# Altium PCB percepcao_externa_official.PcbDoc
Units mm, origin at the board's own origin, x right, y up, seen from the top; angles counter-clockwise.
Board outline 65.02 x 99.95 mm, 2 copper layers (Top Layer, Bottom Layer); 30 components, 27 nets, 149 pads, 15 vias.
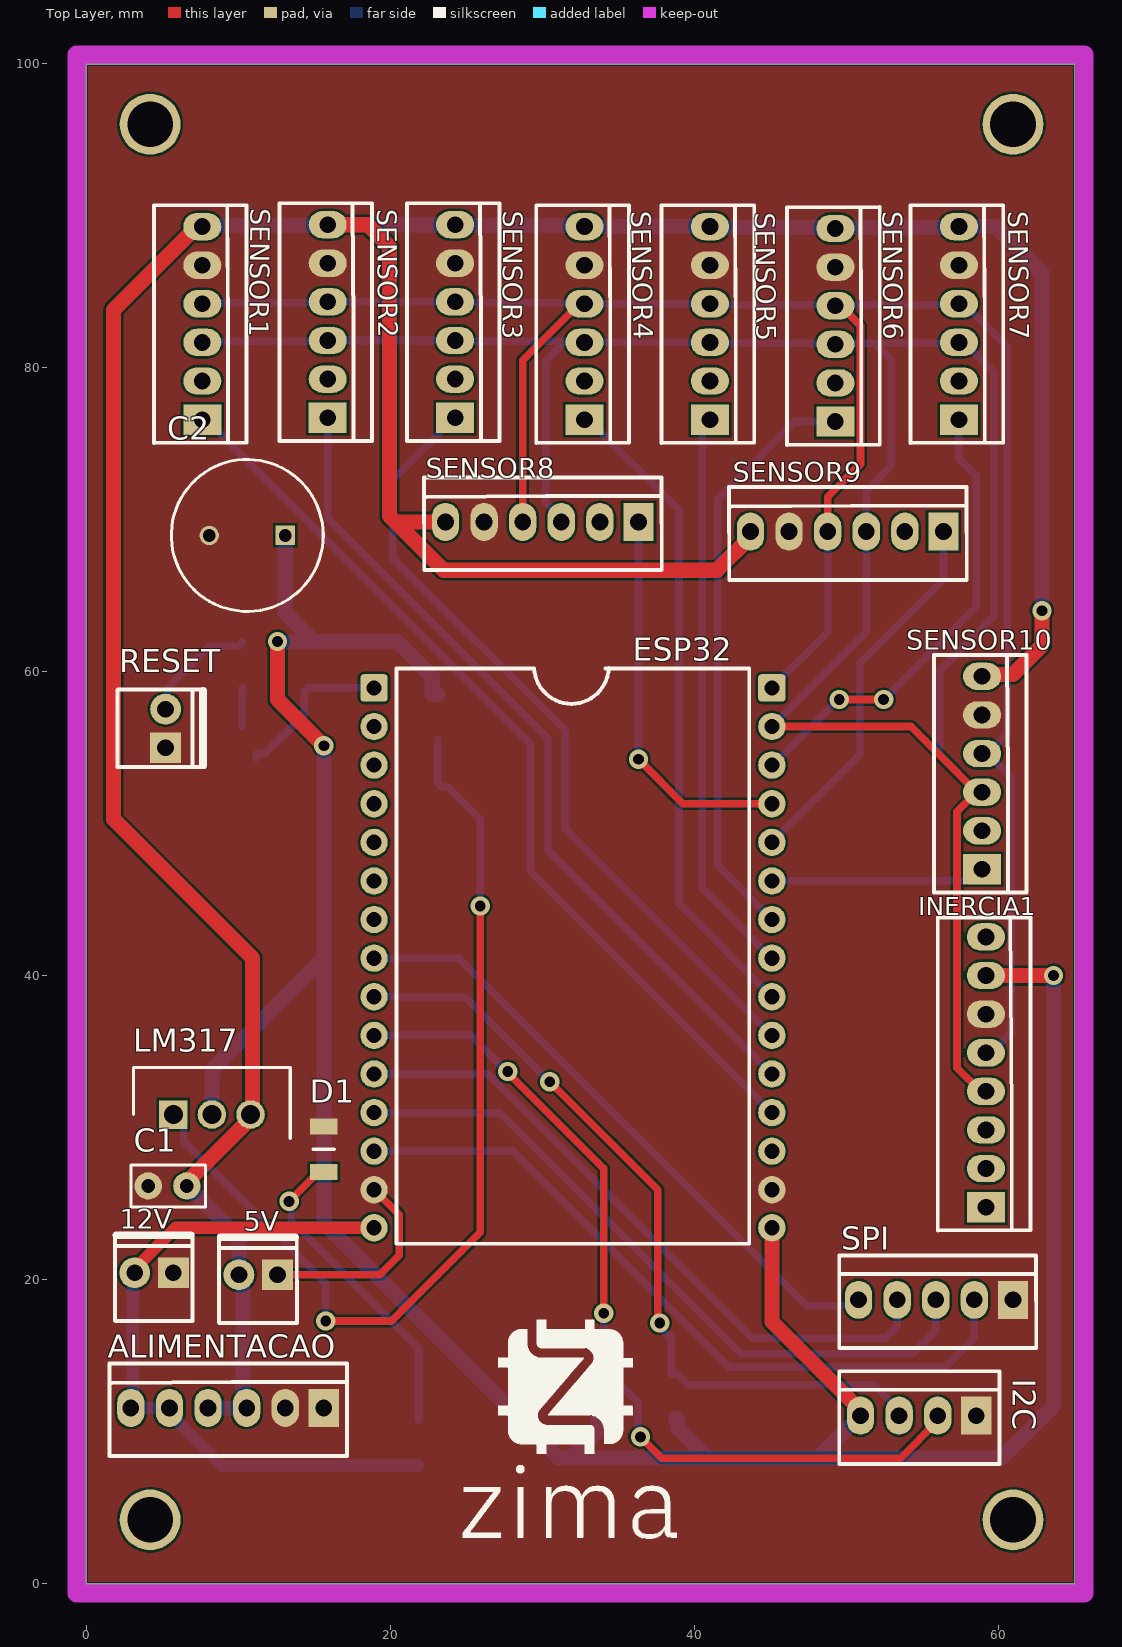
[diagram p0: Top Layer view]
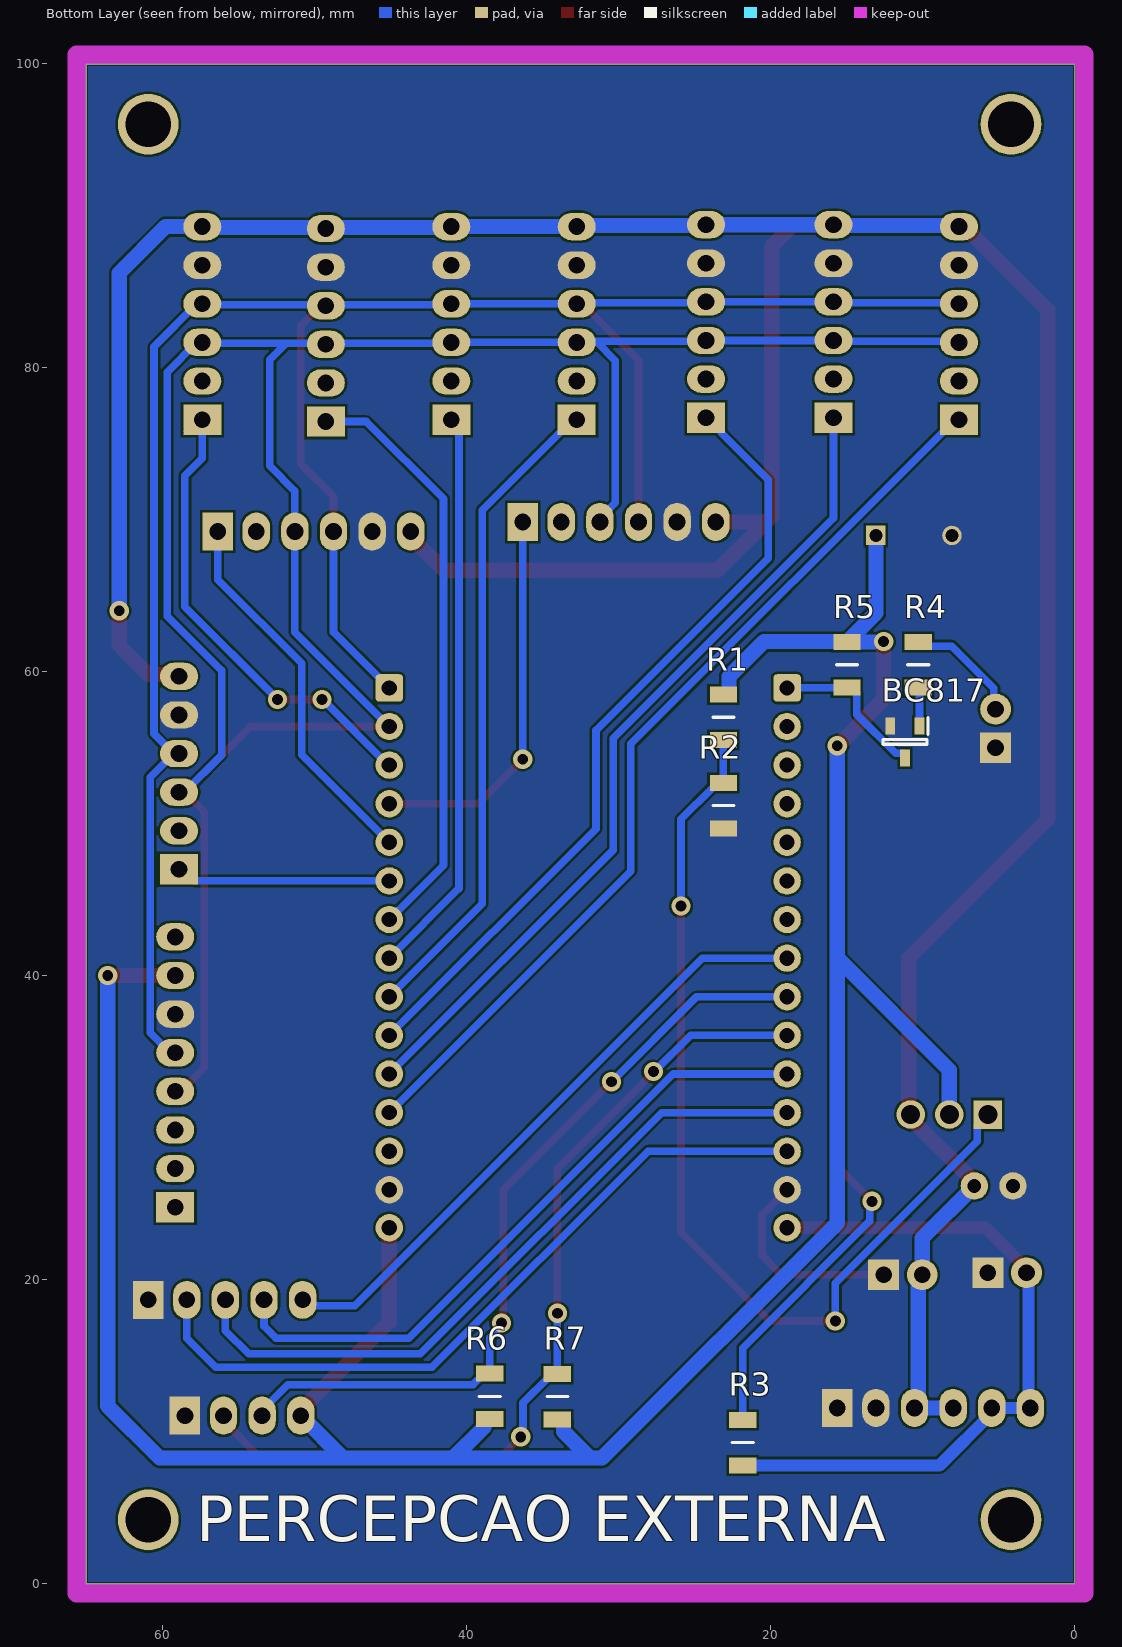
[diagram p1: Bottom Layer view, seen from below]

## Layer stack, top to bottom
Top Solder: solder mask 0.0102, Solder Resist, Dk 3.5
Top Layer: signal copper 0.0356
Dielectric 1: dielectric 0.32, FR-4, Dk 4.8
Bottom Layer: signal copper 0.0356
Bottom Solder: solder mask 0.0102, Solder Resist, Dk 3.5

## Board outline
0,0 65.024,0 65.024,99.949 0,99.949

## Design rules (kind name [scope] priority, off if disabled: settings)
Clearance [All] p1: gap=0.152 ignorepadtopadclearanceinfootprint=FALSE except(0: Arc-Hole Track-Hole SMDPad-Hole THPad-Hole Via-Hole Fill-Hole Poly-Hole Region-Hole Text-Hole)
ComponentClearance [All] p1: gap=0.1 collisioncheckmode=3 verticalgap=0.1 showdistances=FALSE
HoleSize [All] p1: absolutevalues=TRUE maxlimit=3 minlimit=0.025 maxpercent=80.000 minpercent=20.000
MinimumSolderMaskSliver [All] p1: minsoldermaskwidth=0.1
PolygonConnect [All] p1: connectstyle=Direct reliefconductorwidth=0.254 reliefentries=4 polygonreliefangle="90 Angle" airgapwidth=0.254
RoutingVias [All] p1: holewidth=0.4 width=0.8 viastyle="Through Hole" minholewidth=0.3 minwidth=0.6 maxholewidth=0.5 maxwidth=1
SilkToSilkClearance [All] p1: silktosilkclearance=0
SilkToSolderMaskClearance [IsPad] p1: minsilkscreentomaskgap=0 clearancetoexposedcopper=TRUE
SolderMaskExpansion [All] p1: expansion=0.08 istentingtop=FALSE
Width [All] p1: maxlimit=1 minlimit=0.3 preferedwidth=0.5
25 further rules are at their usual default settings.

## Classes and differential pairs
component class U_percepcao_externa_sensores: INERCIA1 SENSOR1 SENSOR2 SENSOR3 SENSOR4 SENSOR5 SENSOR6 SENSOR7 SENSOR8 SENSOR9 SENSOR10
component class U_percepcao_externa_comunicacao: I2C R6 R7 SPI
component class U_percepcao_externa_alimentacao: 5V 12V ALIMENTACAO BC817 D1 R3 R4 R5 RESET
component class percepcao_externa_official: C1 C2 ESP32 LM317 R1 R2

## Components (designator, comment, footprint, x,y, rotation, side; value= is the part's Value field where it differs from the comment)
5V "KK_2.54_2vias" KK_2VIAS_180º 12.573,20.32 r180 top
12V "KK_2.54_2vias" KK_2VIAS_180º 5.715,20.447 r180 top
ALIMENTACAO "KK_2.54_6vias" KK_6vias_180° 15.621,11.557 r180 top
BC817 "Trans BC817" SOT96P240X110-3N 11.176,55.372 r270 bottom
C1 "100nF" "CAP CER DISK 10uF 50V" 5.334,26.162 r0 top
C2 "Cap. Elet. 1uF 50V" "Cap. Elet. 470uF 16V" 13.081,68.961 r180 top
D1 "LED 3MM RED" "LED RED" 15.621,28.575 r90 top
ESP32 "microcontrolador" ESP32_Desvikit_v1 18.923,58.928 r0 top value="ESP32 Desvikit V1"
I2C "KK_2.54_4vias" KK_4vias_180° 58.547,11.049 r180 top
INERCIA1 "KK_2.54_8vias" KK_8vias_180° 59.182,24.765 r90 top
LM317 "LM317" TO254P467X1016X1971-3P 5.715,30.861 r0 top
R1 "240k" RESC3216X60N 23.114,56.999 r90 bottom
R2 "390k" RESC3216X60N 23.114,51.181 r90 bottom
R3 "680R" RESC3216X60N 21.844,9.271 r90 bottom
R4 "2k2" RESC3216X60N 10.287,60.452 r90 bottom
R5 "2k2" RESC3216X60N 14.986,60.452 r90 bottom
R6 "4k7" RESC3216X60N 38.481,12.319 r270 bottom
R7 "4k7" RESC3216X60N 34.036,12.295 r270 bottom
RESET "KK_2.54_2vias" KK_2VIAS_180º 5.207,54.991 r90 top
SENSOR1 "KK_2.54_6vias" KK_6vias_180° 7.62,76.581 r90 top
SENSOR2 "KK_2.54_6vias" KK_6vias_180° 15.875,76.708 r90 top
SENSOR3 "KK_2.54_6vias" KK_6vias_180° 24.257,76.708 r90 top
SENSOR4 "KK_2.54_6vias" KK_6vias_180° 32.766,76.581 r90 top
SENSOR5 "KK_2.54_6vias" KK_6vias_180° 41.021,76.581 r90 top
SENSOR6 "KK_2.54_6vias" KK_6vias_180° 49.276,76.454 r90 top
SENSOR7 "KK_2.54_6vias" KK_6vias_180° 57.404,76.581 r90 top
SENSOR8 "KK_2.54_6vias" KK_6vias_180° 36.322,69.85 r180 top
SENSOR9 "KK_2.54_6vias" KK_6vias_180° 56.388,69.215 r180 top
SENSOR10 "KK_2.54_6vias" KK_6vias_180° 58.928,46.99 r90 top
SPI "KK_2.54_5vias" KK_5vias_180° 60.96,18.669 r180 top

## Footprints (in the part's own frame and the unit in brackets; to place one, negate y for a bottom-side part, rotate by r counter-clockwise, add the part's x,y. Pads: shape width x height; smd on the part's side, far side on the other; paste and mask are expansions set on the pad)
"CAP CER DISK 10uF 50V" [mm] "Connector; Header; 5 Position"
  round 1.8 hole 0.9: 1(-1.27,0) 2(1.27,0)
  silkscreen extent -2.4,-1.4 2.5,1.37, body extent -2.28,-1.25 2.42,1.25, height 6.1
"Cap. Elet. 470uF 16V" [mm]
  rect 1.275x1.275 hole 0.85: 1(0,0)
  round 1.275 hole 0.85: 2(5,0)
  silkscreen extent -2.5,-5 7.5,5, body extent -2.75,-5.25 7.75,5.25, height 13
ESP32_Desvikit_v1 [mm]
  rrect25% 1.8x1.8 hole 1: 1(0,0) 30(26.175,0)
  round 1.8 hole 1: 2(0,-2.54) 3(0,-5.08) 4(0,-7.62) 5(0,-10.16) 6(0,-12.7) 7(0,-15.24) 8(0,-17.78) 9(0,-20.32) 10(0,-22.86) 11(0,-25.4) 12(0,-27.94) 13(0,-30.48) 14(0,-33.02) 15(0,-35.52) 16(26.175,-35.52) 17(26.175,-33.02) 18(26.175,-30.48) 19(26.175,-27.94) 20(26.175,-25.4) 21(26.175,-22.86) 22(26.175,-20.32) 23(26.175,-17.78) 24(26.175,-15.24) 25(26.175,-12.7) 26(26.175,-10.16) 27(26.175,-7.62) 28(26.175,-5.08) 29(26.175,-2.54)
  silkscreen extent 1.47,-36.57 24.69,1.31, body extent -1.2,-46.03 27.4,4.9, height 15.1
KK_2VIAS_180º [mil]
  rect 80x80 hole 43.31: 1(0,0)
  round 80 hole 43.31: 2(100,0)
  silkscreen extent -50,-101 151,125, body extent -61,-108 165,128, height 465
KK_4vias_180° [mm]
  rect 2x2.5 hole 1.1: 1(0,0)
  oval 1.8x2.5 hole 1.1: 2(2.54,0) 3(5.08,0) 4(7.62,0)
  silkscreen extent -1.53,-2.92 9.02,3.18, body extent -1.4,-2.79 8.76,3.01, height 10.12
KK_5vias_180° [mm]
  rect 2x2.5 hole 1.1: 1(0,0)
  oval 1.8x2.5 hole 1.1: 2(2.54,0) 3(5.08,0) 4(7.62,0) 5(10.16,0)
  silkscreen extent -1.53,-2.92 11.43,3.18, body extent -1.4,-2.79 11.3,3.01, height 10.12
KK_6vias_180° [mm]
  rect 2x2.5 hole 1.1: 1(0,0)
  oval 1.8x2.5 hole 1.1: 2(2.54,0) 3(5.08,0) 4(7.62,0) 5(10.16,0) 6(12.7,0)
  silkscreen extent -1.53,-2.92 14.11,3.18, body extent -1.4,-2.79 13.84,3.05, height 10.1
KK_8vias_180° [mm]
  rect 2x2.5 hole 1.1: 1(0,0)
  oval 1.8x2.5 hole 1.1: 2(2.54,0) 3(5.08,0) 4(7.62,0) 5(10.16,0) 6(12.7,0) 7(15.24,0) 8(17.78,0)
  silkscreen extent -1.53,-2.92 19.05,3.18, body extent -1.4,-2.74 18.92,3.1, height 10.1
"LED RED" [mm]
  rect 1.05x1.8 smd: 1(-1.5,0) 2(1.5,0)
  silkscreen extent 0,-0.7 0,0.7, body extent -0.79,-0.43 0.81,0.37, height 0.75
RESC3216X60N [mm]
  rect 1.05x1.8 smd: 1(-1.5,0) 2(1.5,0)
  silkscreen extent 0,-0.7 0,0.7, body extent -1.58,-0.8 1.58,0.8, height 0.6
SOT96P240X110-3N [mm]
  rect 1.1x0.65 smd: 1(-1.05,0.96) 2(-1.05,-0.96) 3(1.05,0)
  silkscreen extent -1.6,-1.45 0.15,1.54, body extent -1.2,-1.45 1.2,1.45, height 1.1
TO254P467X1016X1971-3P [mm]
  rect 1.875x1.875 hole 1.25: 1(0,0)
  round 1.875 hole 1.25: 2(2.54,0) 3(5.08,0)
  silkscreen extent -2.62,-1.59 7.7,3.09, body extent -2.54,-1.59 7.62,3.09, height 18.76

## Part data
5V 12V RESET: "Conector KK 2.54mm 2 vias", Descrição="Conector KK 3 vias com passo 2.54mm", Encapsulamento="PTH - 180º", Modelo="2 vias - 180º", Valor="KK 2 vias 180º"
ALIMENTACAO SENSOR1 SENSOR2 SENSOR3 SENSOR4 SENSOR5 SENSOR6 SENSOR7 SENSOR8 SENSOR9 SENSOR10: "Conector KK 2.54mm 6 vias", Descrição="Conector KK 3 vias com passo 2.54mm", Encapsulamento="PTH - 180º", Modelo="3 vias - 180º", Valor="KK 6 vias 180º"
BC817: "Transistor BJT NPN BC817-25-7-F", Arrow Part Number=BC817-25-7-F, Manufacturer_Name="Diodes Inc.", Mouser Part Number=621-BC817-25-7-F, Arrow Price/Stock=https://www.arrow.com/en/products/bc817-25-7-f/diodes-incorporated, Datasheet Link=https://www.diodes.com/assets/Datasheets/ds11107.pdf, Height=1.1mm, Manufacturer_Part_Number=BC817-25-7-F, Mouser Price/Stock=https://www.mouser.co.uk/ProductDetail/Diodes-Incorporated/BC817-25-7-F?qs=rGAXPo9uwV0jK0EyLZnqOw%3D%3D
C1: library part "CAP CER DISK 10uF 50V_1", "CAP CER DISK 10uF 50V", Capacitance=0.1uF, Capacitance Tolerance="+80%, -20%", Capacitor Terminals="Radial Leaded", Dielectric Characteristic=Y5, Manufacturer=-, Manufacturer Part Number=IMP14925, Operating Temperature Max=85, Operating Temperature Min=-25, Operating Temperature Range="-25°C to +85°C<!--FANDB--><div class=\"features-and-benefits-container\"><div class=\"features-and-benefits-description\"><span class=\"features-benefits-value\">The MCFY series from Multicomp are radial leaded ceramic disc capacitors. The capacitance values ranges from 6800pF to 0.22?F.</span></div><div class=\"features-and-benefits-list\"><ul class=\"features-and-benefits-list-list\"><li class=\"features-and-benefits-list-item\">Large capacitance in small size</li><li class=\"features-and-benefits-list-item\">Rated voltage of 50V</li><li class=\"features-and-benefits-list-item\">80%/-20% tolerance</li><li class=\"features-and-benefits-list-item\">Operating temperature range -25°C to +85", Supplier Part Number 1="Capacitor Cerâmico Disco 100Kpf/50V (104/100K/100nF/0.1uF) cód. 1351", Voltage Rating=50, Capacitance Tolerance ±="+80%, -20%", ComponentLink1Description=http://loja.multcomercial.com.br/capacitor-ceramico-disco-100kpf-50v-104-100k-100nf-0-1uf-cod-1351.html, ComponentLink1URL=http://loja.multcomercial.com.br/capacitor-ceramico-disco-100kpf-50v-104-100k-100nf-0-1uf-cod-1351.html, Lead Spacing=5, Packaging=Each, Pricing 1="1=0.10 (BRL)", Product Range="MCFY Series", RoHS=YES, Stock 1=115809, Supplier 1="Mult Comercial", SVHC="No SVHC (15-Jun-2015)"
C2: library part "Cap. Elet. 470 uF 16V", "Aluminum Organic Polymer Capacitors 16volts 470uF ESR 10mohm", Arrow Part Number=16SEPC470M, Manufacturer_Name=Panasonic, Mouser Part Number=667-16SEPC470M, Arrow Price/Stock=https://www.arrow.com/en/products/16sepc470m/panasonic, Datasheet Link=http://industrial.panasonic.com/www-cgi/jvcr13pz.cgi?E+CI+4+AAB8010+16SEPC470M+8+WW, Height=13mm, Manufacturer_Part_Number=16SEPC470M, Mouser Price/Stock=https://www.mouser.co.uk/ProductDetail/Panasonic/16SEPC470M?qs=OE1iw1LrrPEdZuWyF2l%252B5w%3D%3D
D1: Current If Luminous Intensity=2, Forward Current If=20, Forward Voltage VF Max=2.5, LED Colour=Red, Manufacturer=Paralight, Manufacturer Part Number=IMP585, Operating Temperature Max=85, Operating Temperature Min=-40, Operating Temperature Range="-40°C to +85", Peak Forward Current=7, Supplier Part Number 1="Led 3mm Vermelho Difuso L-314HD - Paralight", Voltage Vf Typ="2.2V<!--FANDB--><div class=\"features-and-benefits-container\"><div class=\"features-and-benefits-description\"><span class=\"features-benefits-value\">The L-934LID from Kingbright is a through hole round shape high efficiency red colour LED. The device is made of gallium arsenide phosphide on gallium phosphide orange light emitting diode. This LED is widely used because of low power consumption, long life and solid state reliability.</span></div><div class=\"features-and-benefits-list\"><ul class=\"features-and-benefits-list-list\"><li class=\"features-and-benefits-list-item\">Standard bulb size of T-1 (3mm)</li><li class=\"features-and-benefits-list-item\">Reliable and rugged</li><li class=\"features-and-benefits-list-item\">Viewing angle is 60°</li><li class=\"features-and-benefits-list-item\">Luminous intensity of 3mcd at 2mA</li><li class=\"features-and-benefits-list-item\">Forward voltage is 2.0V</li><li class=\"features-and-benefits-list-item\">Forward current (If) is 20mA</li><li class=\"features-and-benefits-list-item\">Dominant wavelength is 625nm at IF=20mA</li><li class=\"features-and-benefits-list-item\">Peak wavelength is 627nm at IF=20", Bulb Size=3mm, ComponentLink1Description=http://loja.multcomercial.com.br/led-3mm-vermelho-difuso-l-314hd-paralight.html, ComponentLink1URL=http://loja.multcomercial.com.br/led-3mm-vermelho-difuso-l-314hd-paralight.html, Dominant Wavelength=625, External Diameter=2.9, External Length / Height=4.6, Forward Current If Max=20, Forward Voltage=2, Lead Cross-section Depth=0.5, Lead Cross-section Width=0.5, Lead Spacing=2.54, LED / Lamp Size="3mm / T-1", LED Mounting="Through Hole", LED Type=Standard, Lens Shape=Round, Luminous Intensity=3, Luminous Intensity @ If Min=0.7, Luminous Intensity Typ=3, Mounting Type="PCB Through Hole", MSL=-, No. of Pins=2, Packaging=Each, Peak Wavelength=625, PIV Max=5, Pricing 1="1=0.15 (BRL)", RoHS=YES, Stock 1=35260, Supplier 1="Mult Comercial", SVHC="No SVHC (15-Jun-2015)", Viewing Angle=60°, Wavelength Typ=625
ESP32: library part "ESP32 Desvikit v1", "microcontrolador com moculo bluethoth e wifi"
I2C: "Conector KK 2.54mm 4 vias", Descrição="Conector KK 3 vias com passo 2.54mm", Encapsulamento="PTH - 180º", Modelo="3 vias - 180º", Valor="KK 4 vias 180º"
INERCIA1: "Conector KK 2.54mm 8 vias", Descrição="Conector KK 3 vias com passo 2.54mm", Encapsulamento="PTH - 180º", Modelo="3 vias - 180º", Valor="KK 8 vias 180º"
LM317: "Integrated Circuit", Manufacturer_Name="Changjiang Electronics Tech (CJ)", Datasheet Link=https://datasheet.lcsc.com/szlcsc/Changjiang-Electronics-Tech-CJ-LM317_C22147.pdf, Height=4.67mm, Manufacturer_Part_Number=LM317
R1 R2 R6 R7: library part "RES 1206", "RES 1206 5%", Arrow Part Number=CRCW12064K70FKEA, Manufacturer_Name=Vishay, Mouser Part Number=71-CRCW1206-4.7K-E3, Arrow Price/Stock=https://www.arrow.com/en/products/crcw12064k70fkea/vishay, Datasheet Link=http://docs-emea.rs-online.com/webdocs/13ec/0900766b813ecc08.pdf, Height=0.6mm, Manufacturer_Part_Number=CRCW12064K70FKEA, Mouser Price/Stock=https://www.mouser.co.uk/ProductDetail/Vishay-Dale/CRCW12064K70FKEA?qs=1vm4qhDHCvlKJmatsKzyFQ%3D%3D
R3 R4 R5: library part "Resistor 1206", "Resistor", Arrow Part Number=CRCW12064K70FKEA, Manufacturer_Name=Vishay, Mouser Part Number=71-CRCW1206-4.7K-E3, Arrow Price/Stock=https://www.arrow.com/en/products/crcw12064k70fkea/vishay, Datasheet Link=http://docs-emea.rs-online.com/webdocs/13ec/0900766b813ecc08.pdf, Height=0.6mm, Manufacturer_Part_Number=CRCW12064K70FKEA, Mouser Price/Stock=https://www.mouser.co.uk/ProductDetail/Vishay-Dale/CRCW12064K70FKEA?qs=1vm4qhDHCvlKJmatsKzyFQ%3D%3D
SPI: "Conector KK 2.54mm 5 vias", Descrição="Conector KK 3 vias com passo 2.54mm", Encapsulamento="PTH - 180º", Modelo="3 vias - 180º", Valor="KK 5 vias 180º"

## Free pads (board coordinates)
  round 4 hole 3: 1(4.191,96.012) 2(60.96,96.012) 3(4.191,4.191) 4(60.96,4.191)

## Via types
v1: diameter 1.27, hole 0.711, Top Layer to Bottom Layer, 15 vias

## Nets (pads, with @x,y where several pads share a name; then routed paths per layer and width w, separated by ;. In a path a pad name is that pad's centre, name@x,y a point inside that pad or via, vN(x,y) a via of type N, cw(c..) or ccw(c..) an arc to the next point about the centre after c; other vN are vias at no path point)
3V3: C2.1 ESP32.16 I2C.4 INERCIA1.7 LM317.2 R1.2 R5.2 R6.2 R7.2 | length 187.2
  Top Layer w1: v1(12.573,61.976) 12.573,58.166 v1(15.621,55.118) ; ESP32.16 45.098,17.228 50.927,11.399 I2C.4 ; INERCIA1.7 v1(63.627,40.005)
  Bottom Layer w1: LM317.2 8.255,33.782 15.621,41.148 ; C2.1 13.081,63.857 R5.2 ; v1@13.184,61.952 R5.2 ; v1(15.621,55.118) 15.621,41.148 ; R1.2 22.771,58.499 22.746,58.524 22.746,59.677 20.447,61.976 15.01,61.976 R5.2 ; R7.2 33.661,10.795 33.636,10.77 33.636,10.014 31.877,8.255 ; R6.2@38.754,10.844 38.831,10.844 38.881,10.794 38.881,10.268 40.894,8.255 ; I2C.4 48.133,8.255 ; v1(63.627,40.005) 63.627,11.684 60.198,8.255 48.133,8.255 ; 15.621,41.148 15.621,23.734 31.1,8.255 31.877,8.255 ; 31.877,8.255 40.894,8.255 ; 40.894,8.255 48.133,8.255
+5V: 5V.2 ALIMENTACAO.3 ALIMENTACAO.4 C1.2 LM317.3 SENSOR1.6 SENSOR2.6 SENSOR3.6 SENSOR4.6 SENSOR5.6 SENSOR6.6 SENSOR7.6 SENSOR8.6 SENSOR9.6 SENSOR10.6 | length 228.8
  Top Layer w1: C1.2 6.604,26.416 10.795,30.607 LM317.3 10.922,30.988 10.922,41.148 1.778,50.292 1.778,83.789 7.27,89.281 SENSOR1.6 SENSOR1.6@7.683,89.344 ; SENSOR2.6 18.49,89.408 19.939,87.959 19.939,70.281 ; 19.939,70.231 20.32,69.85 SENSOR8.6 ; 20.355,69.815 23.495,66.675 41.498,66.675 43.688,68.865 SENSOR9.6 ; SENSOR3.6 SENSOR3.6@24.32,89.344 ; SENSOR4.6@32.703,89.344 SENSOR4.6 ; SENSOR5.6 SENSOR5.6@41.084,89.218 ; SENSOR6.6@49.212,89.218 SENSOR6.6 SENSOR6.6@49.34,89.218 ; SENSOR7.6@57.34,89.218 SENSOR7.6 ; SENSOR10.6 59.055,59.817 60.96,59.817 62.865,61.722 v1(62.865,64.008)
  Bottom Layer w1: C1.2 10.033,22.733 5V.2 10.292,20.061 10.292,11.806 ALIMENTACAO.3 ALIMENTACAO.4 ; SENSOR1.6 7.683,89.344 15.811,89.344 SENSOR2.6 SENSOR3.6 24.32,89.344 32.703,89.344 SENSOR4.6 SENSOR5.6 41.084,89.218 49.212,89.218 SENSOR6.6 49.34,89.218 57.34,89.218 SENSOR7.6 59.817,89.281 62.865,86.233 v1(62.865,64.008)
+12V: 12V.2 ALIMENTACAO.5 ALIMENTACAO.6 ESP32.15 R3.1 | length 47.1
  Top Layer w0.8: 12V.2@3.175,20.174 12V.2 3.175,20.72 5.863,23.408 ESP32.15
  Bottom Layer w0.5: ALIMENTACAO.6 ALIMENTACAO.6@3.048,11.684 ; 12V.2@3.048,20.32 12V.2 ; ALIMENTACAO.5@5.461,11.207 ALIMENTACAO.5
  Bottom Layer w0.8: ALIMENTACAO.6 ALIMENTACAO.5 ; ALIMENTACAO.6@3.048,11.684 12V.2@3.048,20.32 ; ALIMENTACAO.5@5.461,11.207 8.897,7.771 R3.1
CLK_IN: ESP32.11 SPI.4 | length 43.7
  Bottom Layer w0.5: ESP32.11 26.416,33.528 43.815,16.129 52.55,16.129 53.34,16.919 SPI.4
EN: BC817.3 ESP32.1 R5.1 | length 10.7
  Bottom Layer w0.5: BC817.3 11.176,54.547 11.251,54.622 11.78,54.622 14.336,57.178 14.336,58.677 14.611,58.952 R5.1 14.998,58.94 18.911,58.94 ESP32.1
GND: 5V.1 12V.1 ALIMENTACAO.1 ALIMENTACAO.2 BC817.2 C1.1 C2.2 D1.2 ESP32.14 ESP32.17 I2C.1 INERCIA1.6 R2.1 RESET.1 SENSOR1.5 SENSOR2.5 SENSOR3.5 SENSOR4.5 SENSOR5.5 SENSOR6.5 SENSOR7.5 SENSOR8.5 SENSOR9.5 SENSOR10.5 SPI.1 | length 13.5
  Top Layer w0.5: 5V.1 19.304,20.32 20.574,21.59 20.574,24.257 ESP32.14
MISO_IN: ESP32.12 SPI.3 | length 46.2
  Bottom Layer w0.5: ESP32.12 27.178,30.988 43.053,15.113 54.356,15.113 55.88,16.637 SPI.3
MOSI_IN: ESP32.13 SPI.2 | length 48.7
  Bottom Layer w0.5: ESP32.13 28.067,28.448 42.291,14.224 56.515,14.224 58.42,16.129 SPI.2
NetBC817_1: BC817.1 R4.1 | length 2.6
  Bottom Layer w0.5: BC817.1 10.216,58.881 R4.1 R4.1@10.293,58.946
NetD1_1: D1.1 R3.2 | length 21.4
  Top Layer w0.5: v1(13.335,25.146) 13.335,25.164 15.246,27.075 D1.1 D1.1@15.367,26.821
  Bottom Layer w0.5: v1(13.335,25.146) 13.482,24.999 13.482,23.856 21.844,15.494 R3.2
NetLM317_1: LM317.1 R1.1 R2.2 | length 64.1
  Top Layer w0.5: v1(15.748,17.272) 20.066,17.272 25.908,23.114 v1(25.908,44.577)
  Bottom Layer w0.5: LM317.1 6.403,30.173 6.403,29.091 15.748,19.746 v1@15.748,17.308 ; R1.1 R2.2 23.389,52.406 23.794,52.406 25.908,50.292 v1(25.908,44.577)
NetR4_2: R4.2 RESET.2 | length 7.7
  Bottom Layer w0.5: RESET.2 5.321,57.645 5.321,58.915 8.083,61.677 10.012,61.677 R4.2
SCL: ESP32.30 INERCIA1.5 SENSOR1.4 SENSOR2.4 SENSOR3.4 SENSOR4.4 SENSOR5.4 SENSOR6.4 SENSOR7.4 SENSOR8.4 SENSOR9.4 SENSOR10.4 | length 148.2
  Top Layer w0.5: SENSOR8.4 28.702,80.487 32.416,84.201 SENSOR4.4 ; SENSOR9.4 48.768,71.501 50.928,73.661 50.928,82.772 49.626,84.074 SENSOR6.4
  Bottom Layer w0.5: SENSOR1.4 7.683,84.264 15.811,84.264 SENSOR2.4 SENSOR3.4 24.32,84.264 32.703,84.264 SENSOR4.4 SENSOR5.4 41.084,84.138 49.212,84.138 SENSOR6.4 SENSOR6.4@49.626,84.074 ; ESP32.30 48.768,62.598 SENSOR9.4 ; SENSOR6.4@49.34,84.138 56.991,84.138 57.054,84.201 SENSOR7.4 57.754,84.201 60.58,81.375 60.58,55.912 SENSOR10.4@59.278,54.61 ; SENSOR10.4 SENSOR10.4@59.278,54.61 ; INERCIA1.5 59.532,34.925 60.834,36.227 60.834,53.054 SENSOR10.4@59.278,54.61
SCL_IN: ESP32.10 I2C.2 R7.1 | length 59.2
  Top Layer w0.5: v1(27.721,33.69) 27.721,33.62 34.036,27.305 v1(34.036,17.78) ; v1(36.449,9.652) 37.846,8.255 53.563,8.255 56.007,10.699 I2C.2
  Bottom Layer w0.5: ESP32.10 25.273,36.068 27.651,33.69 v1(27.721,33.69) ; v1(34.036,17.78) R7.1 34.411,13.795 34.686,13.52 36.302,11.904 36.302,9.799 v1(36.449,9.652)
SDA: ESP32.29 INERCIA1.4 SENSOR1.3 SENSOR2.3 SENSOR3.3 SENSOR4.3 SENSOR5.3 SENSOR6.3 SENSOR7.3 SENSOR8.3 SENSOR9.3 SENSOR10.3 | length 162.1
  Top Layer w0.5: ESP32.29 54.26,56.388 SENSOR10.3@58.578,52.07 ; SENSOR10.3 SENSOR10.3@58.578,52.07 ; INERCIA1.4 58.832,32.385 57.276,33.941 57.276,50.768 SENSOR10.3@58.578,52.07
  Bottom Layer w0.5: SENSOR1.3 7.683,81.724 15.811,81.724 SENSOR2.3 SENSOR3.3 24.32,81.724 31.496,81.724 30.226,80.454 30.226,71.103 31.242,70.087 SENSOR8.3 ; 31.496,81.661 SENSOR4.3 SENSOR5.3 41.084,81.597 49.276,81.597 51.88,81.597 ; ESP32.29 51.308,62.598 51.308,71.882 52.959,73.533 52.959,80.518 51.88,81.597 ; SENSOR10.3 58.578,52.07 56.134,54.514 56.134,60.071 59.707,63.644 59.707,79.708 57.754,81.661 57.69,81.597 51.88,81.597
SDA_IN: ESP32.9 I2C.3 R6.1 | length 52.5
  Top Layer w0.5: v1(30.48,33.02) 37.592,25.908 v1@37.592,17.272
  Bottom Layer w0.5: ESP32.9 24.885,38.608 30.473,33.02 v1(30.48,33.02) ; v1(37.719,17.145) 37.719,16.937 38.481,16.175 R6.1 38.856,13.819 39.594,13.081 51.785,13.081 53.467,11.399 I2C.3
SS: ESP32.8 SPI.5 | length 41.5
  Bottom Layer w0.5: ESP32.8 24.511,41.148 47.381,18.278 50.409,18.278 SPI.5
xshunt1: ESP32.19 SENSOR1.1 | length 61.3
  Bottom Layer w0.5: SENSOR1.1 7.87,76.581 29.21,55.241 29.21,46.876 ESP32.19
xshunt2: ESP32.20 SENSOR2.1 | length 55.3
  Bottom Layer w0.5: SENSOR2.1 15.875,70.104 30.362,55.617 30.362,48.264 ESP32.20
xshunt3: ESP32.21 SENSOR3.1 | length 52.8
  Bottom Layer w0.5: SENSOR3.1 24.007,76.708 23.257,75.958 23.257,75.708 20.161,72.612 20.161,67.469 31.496,56.134 31.496,49.67 ESP32.21
xshunt4: ESP32.22 SENSOR4.1 | length 43.2
  Bottom Layer w0.5: SENSOR4.1 33.016,76.581 38.989,70.608 38.989,44.717 ESP32.22
xshunt5: ESP32.23 SENSOR5.1 | length 37.5
  Bottom Layer w0.5: SENSOR5.1 40.513,76.073 40.513,45.733 ESP32.23
xshunt6: ESP32.24 SENSOR6.1 | length 39
  Bottom Layer w0.5: ESP32.24 41.529,47.257 41.529,71.374 46.609,76.454 SENSOR6.1
xshunt7: ESP32.28 SENSOR7.1 | length 31.9
  Top Layer w0.5: v1(49.53,58.166) v1(52.451,58.166)
  Bottom Layer w0.5: ESP32.28 45.155,53.848 49.473,58.166 v1(49.53,58.166) ; v1(52.451,58.166) 58.547,64.262 58.547,72.898 57.404,74.041 SENSOR7.1 57.654,76.581 SENSOR7.1@58.404,75.831
xshunt8: ESP32.27 SENSOR8.1 | length 25.6
  Top Layer w0.5: v1(36.322,54.229) 39.243,51.308 ESP32.27
  Bottom Layer w0.5: v1(36.322,54.229) SENSOR8.1 ; ESP32.27@45.074,51.332 ESP32.27
xshunt9: ESP32.26 SENSOR9.1 | length 25.1
  Bottom Layer w0.5: ESP32.26 50.867,54.537 50.867,60.539 56.388,66.06 SENSOR9.1
xshunt10: ESP32.25 SENSOR10.1 | length 14.1
  Bottom Layer w0.5: ESP32.25 57.916,46.228 58.678,46.99 SENSOR10.1
pads on no net: ESP32.2 ESP32.3 ESP32.4 ESP32.5 ESP32.6 ESP32.7 ESP32.18 INERCIA1.1 INERCIA1.2 INERCIA1.3 INERCIA1.8 SENSOR1.2 SENSOR2.2 SENSOR3.2 SENSOR4.2 SENSOR5.2 SENSOR6.2 SENSOR7.2 SENSOR8.2 SENSOR9.2 SENSOR10.2

## Polygon pours and split planes (outlines as drawn)
GND on Top Layer "GND_L01_P001" (solid, pour order 1): 65.024,0 65.024,99.949 0,99.949 0,0
GND on Bottom Layer "GND_L02_P002" (solid, pour order 2): 65.024,0 65.024,99.949 0,99.949 0,0

## Keep-outs
Keep-Out Layer:
  lines w1.2: -0.635,-0.635 -0.635,100.584 65.659,100.584 65.659,-0.635 -0.635,-0.635

## Silkscreen, mask and mechanical layers (free items; w line width, h text height)
Top Overlay:
  drawing of 7 lines, arcs and shapes, not listed
Bottom Overlay:
  text "PERCEPCAO EXTERNA" at 57.785,2.794 h3

## Text inside footprints (layer, text, board x,y; h text height)
C1: Mechanical 29 "1" at 4.934,25.062 h0.5